# Altium PCB SWMD_21DD_ LV_DR_Brush_V1.1.pcbdoc (part 1 of 2)
Units mm, origin at the board's own origin, x right, y up, seen from the top; angles counter-clockwise.
Board outline 127.72 x 40.81 mm, 4 copper layers (Top Layer, MidLayer1, MidLayer2, Bottom Layer); 125 components, 86 nets, 396 pads, 310 vias.
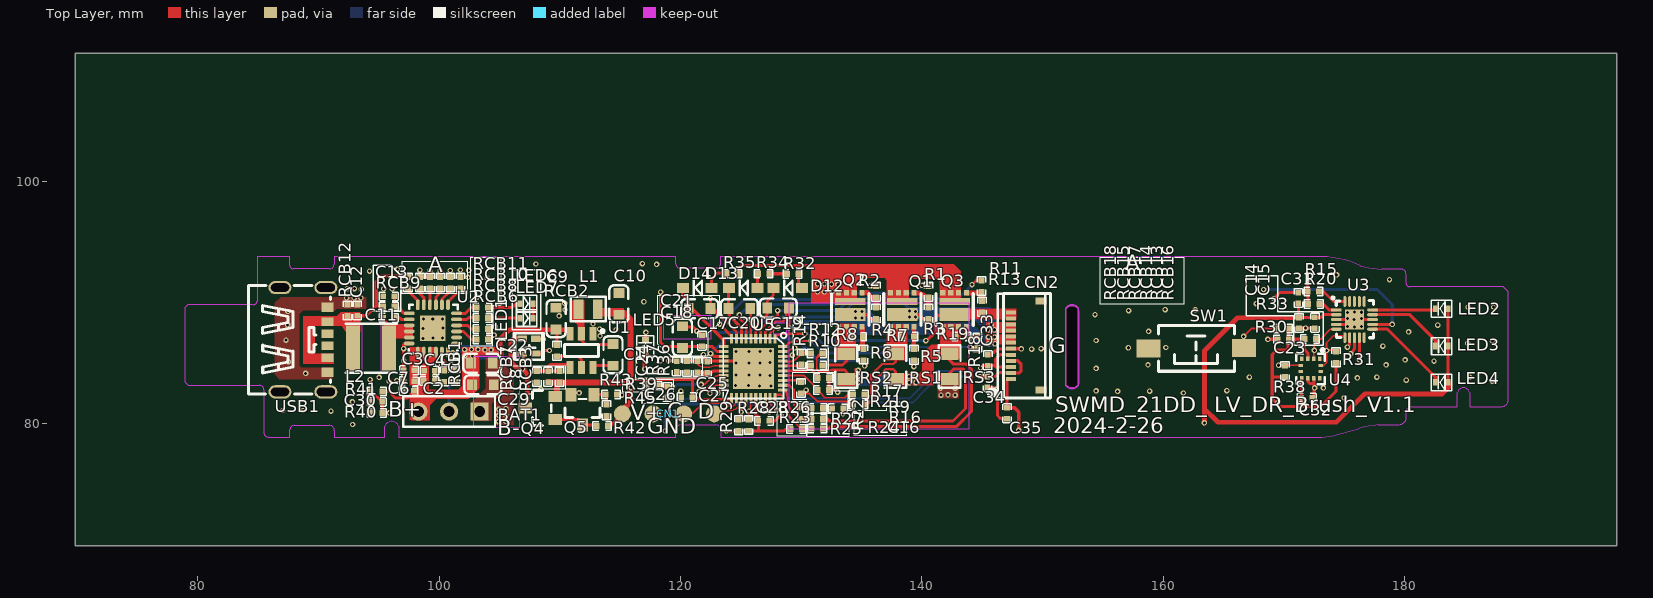
[diagram p0: Top Layer view]
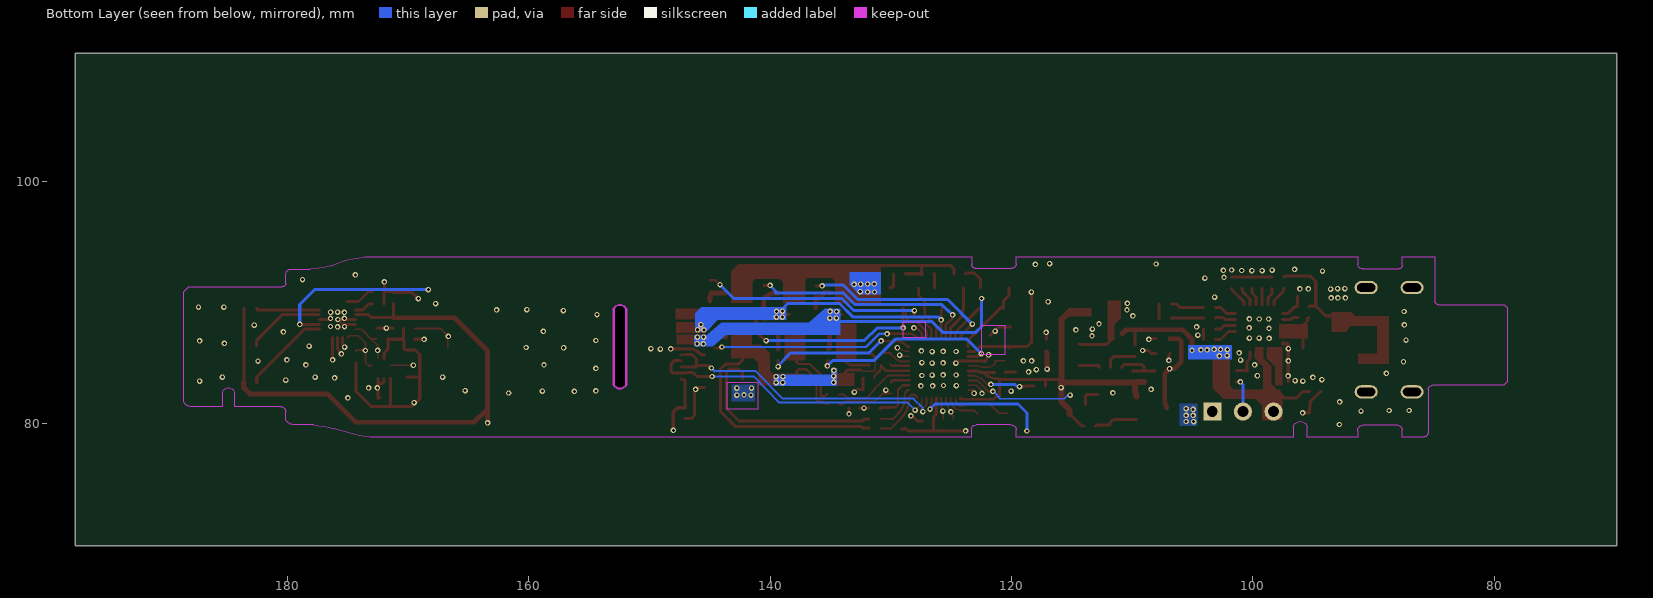
[diagram p1: Bottom Layer view, seen from below]
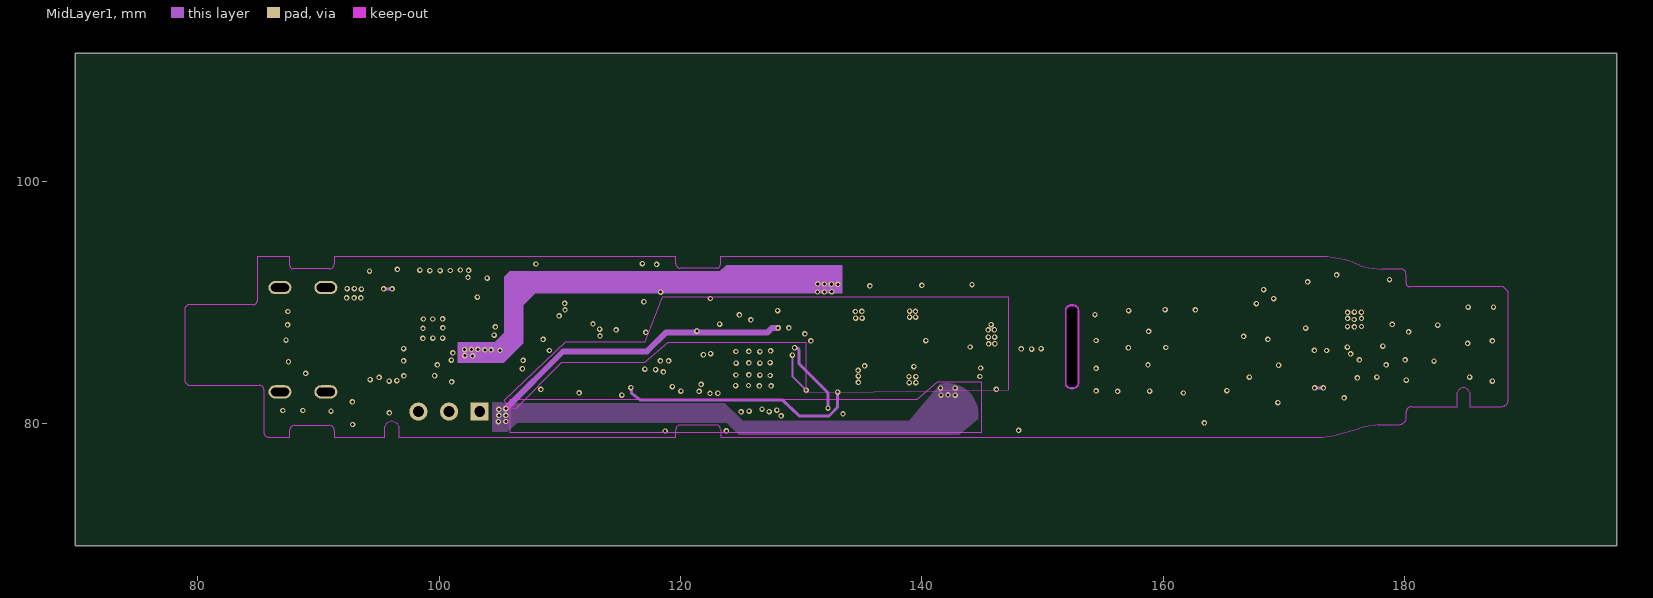
[diagram p2: MidLayer1]
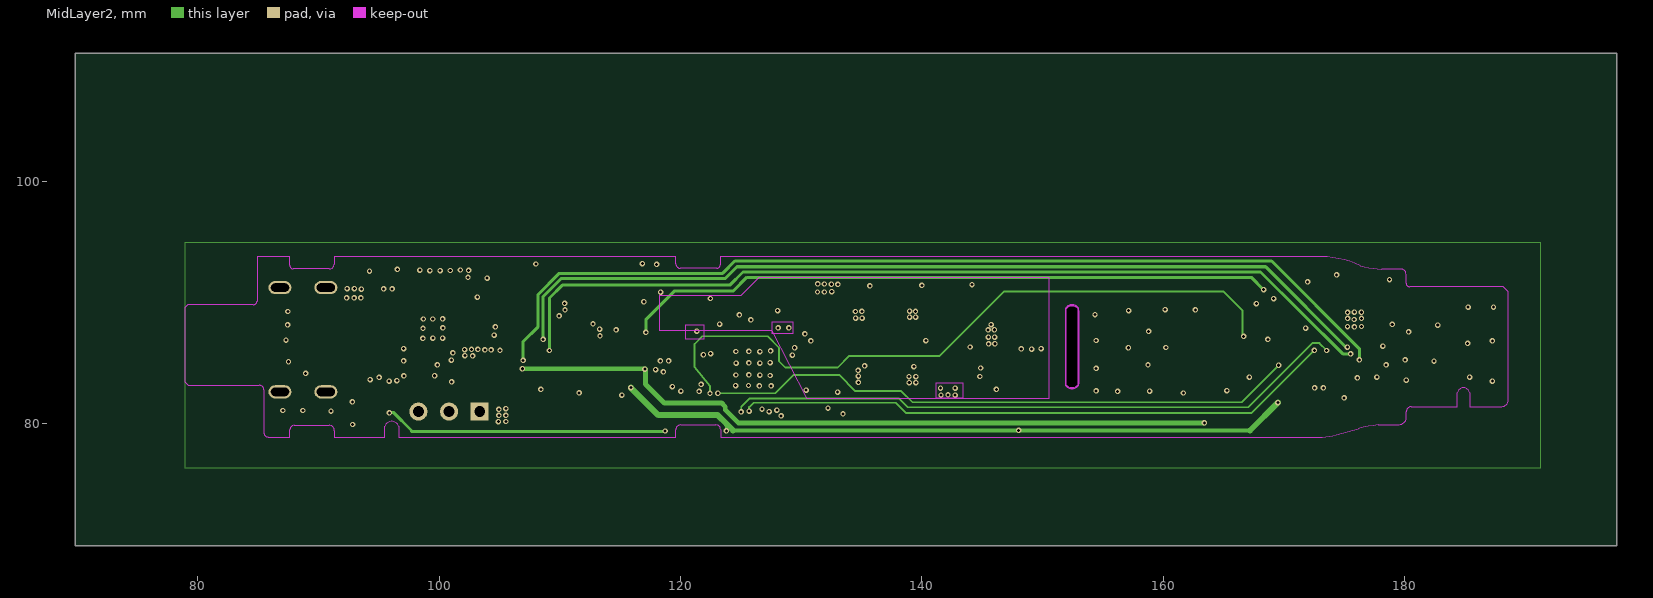
[diagram p3: MidLayer2]

## Layer stack, top to bottom
Top Layer: signal copper (thickness not stored)
Dielectric: dielectric 0.32, FR-4, Dk 4.8
MidLayer1: signal copper (thickness not stored)
Dielectric: dielectric 0.32, FR-4, Dk 4.8
MidLayer2: signal copper (thickness not stored)
Dielectric: dielectric 0.32, FR-4, Dk 4.8
Bottom Layer: signal copper (thickness not stored)

## Board outline
197.57,69.85 69.85,69.85 69.85,110.66 197.57,110.66
cut-out: 151.905,83.375 151.905,89.3 cw(c152.442,89.28) 152.98,89.3 152.98,83.3 cw(c152.446,83.388)

## Components (designator, comment, footprint, x,y, rotation, side; value= is the part's Value field where it differs from the comment)
BAT1 "BAT" HDR1X3 103.359,80.969 r180 top
C1 "C0805" LC-0603_C 114.404,85.672 r270 top
C2 "CC" LC-0402_C 99.181,83.506 r180 top
C3 "CC" LC-0402_C 97.51,84.387 r0 top
C4 "CC" LC-0402_C 99.198,84.366 r180 top
C5 "CC" LC-0402_C 100.429,83.894 r270 top
C6 "CC" LC-0402_C 97.467,82.692 r180 top
C7 "CC" LC-0402_C 97.508,83.478 r0 top
C8 "CC" LC-0402_C 109.03,83.86 r90 top
C9 "C0805" LC-0603_C 109.686,88.674 r90 top
C10 "C0805" LC-0603_C 114.892,89.895 r90 top
C11 "CC" LC-0402_C 95.82,88.75 r180 top
C12 "CC" LC-0402_C 93.214,89.361 r90 top
C13 "CC" LC-0402_C 95.82,90.52 r180 top
C14 "CC" LC-0402_C 171.242,88.316 r270 top
C15 "CC" LC-0402_C 172.563,88.329 r270 top
C16 "C0603" LC-0402_C 133.029,81.254 r180 top
C17 "CAP_S" LC-0402_C 121.778,86.835 r270 top
C18 "C0805" LC-0603_C 120.157,87.142 r270 top
C19 "C0805" LC-0603_C 128.09,89.55 r0 top
C20 "C0805" LC-0603_C 124.88,89.5 r0 top
C21 "C0805" LC-0603_C 121.58,89.5 r0 top
C22 "C0805" LC-0603_C 103.537,84.982 r0 top
C23 "CC" LC-0402_C 169.931,86.964 r180 top
C24 "CAP_S" LC-0402_C 119.68,84.7 r270 top
C25 "CAP_S" LC-0402_C 122.2,84.65 r90 top
C26 "CAP_S" LC-0402_C 118.9,82.59 r270 top
C27 "CAP_S" LC-0402_C 120.525,82.163 r0 top
C28 "CAP_S" LC-0402_C 126.907,80.196 r180 top
C29 "C0805" LC-0603_C 103.627,83.192 r0 top
C30 "CAP_S" LC-0402_C 94.83,81.77 r0 top
C31 "CAPACITOR" LC-0402_C 171.193,90.381 r90 top
C32 "CC" LC-0402_C 171.891,82.122 r0 top
C33 "CAP_S" LC-0402_C 145.46,85.23 r90 top
C34 "CAP_S" LC-0402_C 145.42,83.42 r270 top
C35 "CAP_S" LC-0402_C 147.05,80.83 r270 top
CN1 "4P-2.54-8" XH2.54-SMD4P 118.993,80.78 r0 top
CN2 "CON12" SMD-12 147.38,89.177 r270 top
D12 "DIODE" LC-SOD-323 128.88,91.2 r0 top
D13 "DIODE" LC-SOD-323 125.18,91.2 r0 top
D14 "DIODE" LC-SOD-323 121.38,91.2 r0 top
L1 "L_-_5X4" L1206A 111.552,89.439 r0 top
L2 "L_-_5X4" L1206 92.848,86.241 r0 top
LED1 "LED-1" LED0402-4 108.008,85.783 r90 top
LED2 "LED" LED0402 183.58,89.5 r90 top
LED3 "LED" LED0402 183.581,86.406 r90 top
LED4 "LED" LED0402 183.58,83.4 r90 top
LED5 "LED" LED0402 117.104,85.9 r0 top
LED6 "LED" LED0402 106.72,89.9 r270 top
LED7 "LED" LED0402 106.72,88.7 r270 top
Q1 "CJBM3020" DFN-3X3_8 139.35,90.8 r180 top
Q2 "CJBM3020" DFN-3X3_8 135.04,90.8 r180 top
Q3 "CJBM3020" DFN-3X3_8 143.683,90.8 r180 top
Q4 "PMOS_3" LC-SOT-23(SOT-23-3) 108.38,81.26 r0 top
Q5 "PMOS_3" LC-SOT-23(SOT-23-3) 111.88,81.115 r90 top
R1 "RES_SEMI" LC-0402_R 140.53,90.89 r270 top
R2 "RES_SEMI" LC-0402_R 136.2,90.89 r270 top
R3 "RES_SEMI" LC-0402_R 140.53,89.1 r90 top
R4 "RES_SEMI" LC-0402_R 136.21,89.1 r270 top
R5 "RES_SEMI" LC-0402_R 139.327,85.688 r90 top
R6 "RES_SEMI" LC-0402_R 135.157,85.696 r90 top
R7 "RES_SEMI" LC-0402_R 138.88,87.2 r0 top
R8 "RES_SEMI" LC-0402_R 134.63,87.17 r0 top
R9 "R0402" LC-0402_R 131.83,83.76 r0 top
R10 "RES_SEMI" LC-0402_R 131.29,84.8 r180 top
R11 "RES_SEMI" LC-0402_R 144.942,91.366 r270 top
R12 "RES_SEMI" LC-0402_R 131.29,85.8 r180 top
R13 "RES_SEMI" LC-0402_R 144.997,89.66 r90 top
R14 "R0402" LC-0402_R 130.03,85.35 r90 top
R15 "R" LC-0402_R 172.442,90.928 r180 top
R16 "R0402" LC-0402_R 131.81,82.77 r0 top
R17 "RES_SEMI" LC-0402_R 134.76,82.39 r180 top
R18 "RES_SEMI" LC-0402_R 144.595,86.7 r90 top
R19 "RES_SEMI" LC-0402_R 143.28,87.191 r0 top
R20 "R" LC-0402_R 172.459,89.888 r180 top
R21 "RES_SEMI" LC-0402_R 134.75,81.57 r180 top
R22 "R0402" LC-0402_R 129.97,82.93 r270 top
R23 "R0402" LC-0402_R 129.59,79.53 r180 top
R24 "RES_SEMI" LC-0402_R 131.33,81.25 r0 top
R25 "RES_SEMI" LC-0402_R 131.32,79.56 r180 top
R26 "R0402" LC-0402_R 130.04,80.84 r270 top
R27 "RES_SEMI" LC-0402_R 131.32,80.37 r180 top
R28 "R" LC-0402_R 125.654,79.854 r270 top
R29 "R" LC-0402_R 124.822,79.848 r90 top
R30 "R" LC-0402_R 169.914,87.851 r180 top
R31 "R" LC-0402_R 174.297,85.476 r90 top
R32 "RES_T" LC-0402_R 129.28,92.385 r0 top
R33 "R" LC-0402_R 172.16,86.976 r180 top
R34 "RES_T" LC-0402_R 126.88,92.39 r180 top
R35 "RES_T" LC-0402_R 124.3,92.39 r180 top
R36 "R0402" LC-0402_R 121.39,84.68 r90 top
R37 "R0402" LC-0402_R 120.53,84.69 r90 top
R38 "R" LC-0402_R 170.077,84.328 r270 top
R39 "R0402" LC-0402_R 117.66,83.09 r0 top
R40 "RES1" LC-0402_R 94.83,80.85 r0 top
R41 "RES1" LC-0402_R 94.83,82.63 r0 top
R42 "RES1" LC-0402_R 113.504,79.758 r0 top
R43 "RES1" LC-0402_R 114.253,82.387 r0 top
R45 "RES1" LC-0402_R 113.869,81.075 r270 top
RCB1 "RR" LC-0402_R 101.365,83.907 r270 top
RCB2 "RR" LC-0402_R 109.781,86.01 r270 top
RCB3 "RR" LC-0402_R 109.98,83.85 r270 top
RCB6 "RR" LC-0402_R 103.59,86.94 r0 top
RCB7 "RR" LC-0402_R 108.11,83.86 r90 top
RCB8 "RR" LC-0402_R 103.59,87.82 r0 top
RCB9 "RR" LC-0402_R 95.82,89.66 r180 top
RCB10 "RR" LC-0402_R 103.58,88.72 r180 top
RCB11 "RR" LC-0402_R 103.59,89.6 r180 top
RCB12 "RR" LC-0402_R 92.39,89.35 r90 top
RCB13 "RR" LC-0402_R 100.92,91.66 r90 top
RCB14 "RR" LC-0402_R 100.09,91.66 r90 top
RCB15 "RR" LC-0402_R 98.42,91.66 r90 top
RCB16 "RR" LC-0402_R 101.77,91.66 r90 top
RCB17 "RR" LC-0402_R 99.25,91.66 r90 top
RCB18 "RR" LC-0402_R 97.43,91.66 r90 top
RS1 "RES_2512" LC-0805_R 137.8,84.71 r90 top
RS2 "RES_2512" LC-0805_R 133.73,84.705 r90 top
RS3 "RES_2512" LC-0805_R 142.3,84.71 r90 top
SW1 "SW-PB" SW_SMD-3_6_2.5 162.705,86.213 r180 top
U1 "TP8204HS" LC-SOT-23-6 111.79,86.029 r90 top
U2 "IP2326" QFN-24 101.442,86.609 r90 top
U3 "HTR3212S" QFN-20 174.339,89.395 r270 top
U4 "DA260B" LGA12 172.97,85.349 r180 top
U5 "SWM21DD8U7" QFN40 126.032,84.552 r270 top
USB1 "TYPE-C_6P" TYPE-C-SMD_6P 88.776,86.924 r270 top

## Footprints (in the part's own frame and the unit in brackets; to place one, negate y for a bottom-side part, rotate by r counter-clockwise, add the part's x,y. Pads: shape width x height; smd on the part's side, far side on the other; paste and mask are expansions set on the pad)
DFN-3X3_8 [mil]
  rect 17x18 smd: 1(0,0) 2(25.59,0) 3(51.18,0) 4(76.77,0) 5(76.77,109.58) 6(51.18,109.58) 7(25.59,109.58) 8(0,109.58)
  rect 100x23 smd: 9(38.33,27.5)
  rect 100x42 smd: 10(38.33,70.83)
  silkscreen extent -23,2 99,106
HDR1X3 [mm]
  rect 1.5x1.5 hole 0.9: 1(0,0)
  round 1.5 hole 0.9: 2(2.54,0) 3(5.08,0)
  silkscreen extent -1.27,-1.27 6.35,1.27
L1206 [mil]
  rect 46x147 smd: 1(0,0) 2(117.92,0)
  silkscreen extent -23,-80 143,80
L1206A [mm]
  rect 0.8x1.6 smd: 1(0,0) 2(1.6,0)
  silkscreen extent -0.63,-0.97 2.26,1.04
LC-0402_C [mm]
  rect 0.46x0.46 smd: 1(-0.45,0) 2(0.45,0)
  silkscreen extent -0.78,-0.35 0.77,0.36
LC-0402_R [mm]
  rect 0.5x0.5 smd: 1(-0.48,0) 2(0.48,0)
  silkscreen extent -0.78,-0.35 0.77,0.35
LC-0603_C [mm]
  rect 0.8x0.9 smd: 1(-0.9,0) 2(0.9,0)
  silkscreen extent -1.53,-0.79 1.53,0.79
LC-0805_R [mm]
  rect 1x1.47 smd: 1(-1.05,0) 2(1.05,0)
  silkscreen extent -1.77,-0.9 1.77,0.9
LC-SOD-323 [mm]
  rect 1x0.83 smd: 1(1.18,0) 2(-1.18,0)
  silkscreen extent -0.27,-0.6 0.4,0.6
LC-SOT-23(SOT-23-3) [mm]
  rect 1.1x0.9 smd: 1(1.25,-0.95) 2(1.25,0.95) 3(-1.25,0)
  silkscreen extent -0.65,-1.46 0.9,1.46
LC-SOT-23-6 [mm]
  rect 1.1x0.6 smd: 1(1.4,-0.95) 2(1.4,0) 3(1.4,0.95) 4(-1.4,0.95) 5(-1.4,0) 6(-1.4,-0.95)
  silkscreen extent -0.5,-1.87 1.72,1.4
LED0402 [mil]
  rect 22x16 smd: 1(0,0) 2(0,41.25)
  silkscreen extent -28,-12 27,54
LED0402-4 [mil]
  rect 21x32 smd: 1(0,0) 2(48.33,0) 3(48.33,44.17) 4(0,44.17)
  silkscreen extent -20,-26 65,67
LGA12 [mil]
  rect 11x15 smd: 1(0,0) 2(19.68,0) 3(39.37,0) 4(59.05,0) 7(59.05,63.85) 8(39.37,63.85) 9(19.68,63.85) 10(0,63.85)
  rect 15x11 smd: 5(61.67,22.08) 6(61.67,41.77) 11(-2.61,41.77) 12(-2.61,22.08)
  silkscreen extent -16,-32 77,83
QFN40 [mm]
  rect 0.8x0.25 smd: 1(-2.45,1.8) 2(-2.45,1.4) 3(-2.45,1) 4(-2.45,0.6) 5(-2.45,0.2) 6(-2.45,-0.2) 7(-2.45,-0.6) 8(-2.45,-1) 9(-2.45,-1.4) 10(-2.45,-1.8) 21(2.45,-1.8) 22(2.45,-1.4) 23(2.45,-1) 24(2.45,-0.6) 25(2.45,-0.2) 26(2.45,0.2) 27(2.45,0.6) 28(2.45,1) 29(2.45,1.4) 30(2.45,1.8)
  rect 0.25x0.8 smd: 11(-1.8,-2.45) 12(-1.4,-2.45) 13(-1,-2.45) 14(-0.6,-2.45) 15(-0.2,-2.45) 16(0.2,-2.45) 17(0.6,-2.45) 18(1,-2.45) 19(1.4,-2.45) 20(1.8,-2.45) 31(1.8,2.45) 32(1.4,2.45) 33(1,2.45) 34(0.6,2.45) 35(0.2,2.45) 36(-0.2,2.45) 37(-0.6,2.45) 38(-1,2.45) 39(-1.4,2.45) 40(-1.8,2.45)
  rect 3.4x3.4 smd: 41(0,0)
  silkscreen extent -2.96,-2.5 2.5,2.74
QFN-20 [mil]
  rect 10x35 smd: 1(0,0)
  oval 10x35 smd: 2(15.75,0) 3(31.5,0) 4(47.24,0) 5(62.99,0) 11(62.99,117.99) 12(47.24,117.99) 13/2(31.5,117.99) 14(15.75,117.99) 15(0,117.99)
  oval 35x10 smd: 6(90.49,27.5) 7(90.49,43.25) 8(90.49,59) 9(90.49,74.74) 10(90.49,90.49) 16(-27.5,90.49) 17(-27.5,74.74) 18(-27.5,59) 19(-27.5,43.25) 20(-27.5,27.5)
  rect 65x63 smd: 13(31.5,59)
  silkscreen extent -40,-12 91,122
QFN-24 [mil]
  rect 83x83 smd: 0(49.21,77.13)
  oval 12x35 smd: 1(0,0) 2(19.69,0) 3(39.37,0) 4(59.06,0) 5(78.74,0) 6(98.43,0) 13(98.43,154.26) 14(78.74,154.26) 15(59.06,154.26) 16(39.37,154.26) 17(19.69,154.26) 18(0,154.26)
  oval 35x12 smd: 7(126.34,27.92) 8(126.34,47.6) 9(126.34,67.29) 10(126.34,86.97) 11(126.34,106.66) 19(-27.92,126.34) 20(-27.92,106.66) 21(-27.92,86.97) 22(-27.92,67.29) 23(-27.92,47.6) 24(-27.92,27.92)
  oval 35x12.01 smd: 12(126.34,126.34)
  silkscreen extent -32,-4 127,155
SMD-12 [mil]
  rect 22x36 smd: 0(252.38,97.5) 0/2(-37.62,97.5)
  rect 13x32 smd: 1(216.53,0) 2(196.85,0) 3(177.16,0) 4(157.48,0) 5(137.79,0) 6(118.11,0) 7(98.42,0) 8(78.74,0) 9(59.05,0) 10(39.37,0) 11(19.68,0) 12(0,0)
  silkscreen extent -62,-25 279,130
SW_SMD-3_6_2.5 [mm]
  rect 2x1.5 smd: 1(-3.996,-0.02) 2(3.937,0)
  silkscreen extent -3.21,-1.9 3.09,1.9
TYPE-C-SMD_6P [mm]
  oval 1.1x1.9 hole 0.7 slot 1.5 at 90 deg: 7(-4.32,-1.963) 7/2(4.32,-1.963) 7/3(-4.32,1.838) 7/4(4.32,1.838)
  rect 0.7x1 smd: A5(-0.5,1.963) A9(1.5,1.963) B5(0.5,1.963) B9(-1.5,1.963)
  rect 0.8x1 smd: A12(2.7,1.963) B12(-2.7,1.963)
  silkscreen extent -4.5,-4.56 4.5,2.24
XH2.54-SMD4P [mm]
  round 1.4 smd: 1(-3.81,0) 2(-1.27,0) 3(1.27,0) 4(3.81,0)

## Via types
v1: diameter 0.45, hole 0.25, Top Layer to Bottom Layer, 310 vias

## Nets (pads, with @x,y where several pads share a name; then routed paths per layer and width w, separated by ;. In a path a pad name is that pad's centre, name@x,y a point inside that pad or via, vN(x,y) a via of type N, cw(c..) or ccw(c..) an arc to the next point about the centre after c; other vN are vias at no path point)
3V3: C8.1 C10.1 C23.1 C25.1 C27.2 C28.2 C32.1 C35.1 CN1.1 CN2.1 L1.2 Q4.2 R9.2 R16.2 R23.2 R28.2 R29.1 R30.1 R31.1 R33.2 R36.1 R38.2 R39.1 R42.2 RCB3.2 U4.3 U4.7 U5.16 U5.21 U5.26 | length 477.9
  Top Layer w0.2: C27.2@120.975,82.163 120.98,82.19 121.31,82.19 121.5,82 U5.21@124.232,82
  Top Layer w0.25: R42.2@113.984,79.758 114.203,79.758 114.203,79.8 CN1.1@115.183,80.78 ; R39.1@117.18,83.09 117.18,83.59 117.22,83.63 ; C27.2@120.975,82.163 120.975,83.655 120.99,83.67 ; R36.1@121.43,84.16 R36.1@121.39,84.2 C25.1@122.01,84.2 ; U5.21@124.232,82 U5.21@124.232,82.102 ; 124.412,79.368 125.19,79.368 ; R29.1@124.822,79.368 125.19,79.368 ; U5.26@126.232,82.102 126.232,80.738 126.48,80.49 ; C28.2@126.457,80.196 126.48,80.303 126.48,80.49 ; R23.2@129.11,79.53 129.06,79.53 129.048,79.541 128.901,79.541 128.824,79.619 128.58,79.374 126.48,79.374 ; R9.2@132.31,83.76 R16.2@132.29,82.77 132.74,82.85 v1(133.01,82.58) ; C35.1@147.05,81.28 147.05,83.566 CN2.1@147.38,83.677 ; R38.2@170.077,83.848 170.082,83.843 170.082,83.85 169.027,83.85 ; R30.1@170.394,87.851 170.381,87.838 C23.1@170.381,86.964 ; U4.7@171.47,83.727 171.441,83.697 C32.1@171.441,82.122 171.463,82.101 171.463,81.403 ; R33.2@171.68,86.976 R33.2@171.67,86.966 ; U4.3@171.97,85.349 171.97,85.83 171.67,86.131 R33.2@171.67,86.966 ; R31.1@174.297,84.996 174.297,82.64 173.06,81.403 171.463,81.403 ; 115.87,83.63 117.22,83.63 ; 115.87,83.63 117.22,83.63 ; 115.87,83.63 117.22,83.63 ; 115.87,83.63 117.22,83.63 ; 115.87,83.63 117.22,83.63 ; 115.87,83.63 117.22,83.63 ; 115.87,83.63 117.22,83.63 ; 115.87,83.63 117.22,83.63 ; 115.87,83.63 117.22,83.63 ; 115.87,83.63 117.22,83.63 ; 115.87,83.63 117.22,83.63 ; 115.87,83.63 117.22,83.63 ; 117.22,83.63 120.923,83.63 ; 117.22,83.63 120.923,83.63 ; 117.22,83.63 120.923,83.63 ; 117.22,83.63 120.923,83.63 ; 117.22,83.63 120.923,83.63 ; 117.22,83.63 120.923,83.63 ; 117.22,83.63 120.923,83.63 ; 117.22,83.63 120.923,83.63 ; 117.22,83.63 120.923,83.63 ; 117.22,83.63 120.923,83.63 ; 117.22,83.63 120.923,83.63 ; 117.22,83.63 120.923,83.63 ; 117.22,83.63 120.923,83.63 ; 120.923,83.63 120.99,83.67 ; 120.923,83.63 120.99,83.67 ; 120.923,83.63 120.99,83.67 ; 120.923,83.63 120.99,83.67 ; 120.923,83.63 120.99,83.67 ; 120.923,83.63 120.99,83.67 ; 120.923,83.63 120.99,83.67 ; 120.923,83.63 120.99,83.67 ; 120.923,83.63 120.99,83.67 ; 120.923,83.63 120.99,83.67 ; 120.923,83.63 120.99,83.67 ; 120.923,83.63 120.99,83.67 ; 120.923,83.63 120.99,83.67 ; 120.99,83.67 121.442,83.696 ; 120.99,83.67 121.442,83.696 ; 120.99,83.67 121.442,83.696 ; 120.99,83.67 121.442,83.696 ; 120.99,83.67 121.442,83.696 ; 120.99,83.67 121.442,83.696 ; 120.99,83.67 121.442,83.696 ; 120.99,83.67 121.442,83.696 ; 120.99,83.67 121.442,83.696 ; 120.99,83.67 121.442,83.696 ; 120.99,83.67 121.442,83.696 ; 120.99,83.67 121.442,83.696 ; 120.99,83.67 121.442,83.696 ; 120.99,83.67 121.442,83.696 ; 121.442,83.696 122.07,83.96 ; 121.442,83.696 122.07,83.96 ; 121.442,83.696 122.07,83.96 ; 121.442,83.696 122.07,83.96 ; 121.442,83.696 122.07,83.96 ; 121.442,83.696 122.07,83.96 ; 121.442,83.696 122.07,83.96 ; 121.442,83.696 122.07,83.96 ; 121.442,83.696 122.07,83.96 ; 121.442,83.696 122.07,83.96 ; 121.442,83.696 122.07,83.96 ; 121.442,83.696 122.07,83.96 ; 121.442,83.696 122.07,83.96 ; 121.442,83.696 122.07,83.96 ; C25.1@122.01,84.2 C25.1@122.2,84.2 ; C25.1@122.01,84.2 122.25,84.2 C25.1@122.01,84.2 ; 122.07,83.96 C25.1@122.2,84.09 ; 122.07,83.96 C25.1@122.2,84.09 ; 122.07,83.96 C25.1@122.2,84.09 ; 122.07,83.96 C25.1@122.2,84.09 ; 122.07,83.96 C25.1@122.2,84.09 ; 122.07,83.96 C25.1@122.2,84.09 ; 122.07,83.96 C25.1@122.2,84.09 ; 122.07,83.96 C25.1@122.2,84.09 ; 122.07,83.96 C25.1@122.2,84.09 ; 122.07,83.96 C25.1@122.2,84.09 ; 122.07,83.96 C25.1@122.2,84.09 ; 122.07,83.96 C25.1@122.2,84.09 ; 122.07,83.96 C25.1@122.2,84.09 ; 122.07,83.96 C25.1@122.2,84.09 ; C25.1@122.2,84.09 C25.1@122.2,84.2 ; C25.1@122.2,84.09 C25.1@122.2,84.2 ; C25.1@122.2,84.09 C25.1@122.2,84.2 ; C25.1@122.2,84.09 C25.1@122.2,84.2 ; C25.1@122.2,84.09 C25.1@122.2,84.2 ; C25.1@122.2,84.09 C25.1@122.2,84.2 ; C25.1@122.2,84.09 C25.1@122.2,84.2 ; C25.1@122.2,84.09 C25.1@122.2,84.2 ; C25.1@122.2,84.09 C25.1@122.2,84.2 ; C25.1@122.2,84.09 C25.1@122.2,84.2 ; C25.1@122.2,84.09 C25.1@122.2,84.2 ; C25.1@122.2,84.09 C25.1@122.2,84.2 ; C25.1@122.2,84.09 C25.1@122.2,84.2 ; C25.1@122.2,84.09 C25.1@122.2,84.2 ; 122.599,84.201 122.251,84.201 122.599,84.201 ; 122.599,84.201 122.75,84.352 ; 122.599,84.201 122.75,84.352 ; 122.75,84.352 U5.16@123.582,84.352 122.75,84.352 ; v1(123.8,79.37) 125.188,79.37 ; v1(123.8,79.37) 125.188,79.37 ; v1(123.8,79.37) 125.188,79.37 ; 125.19,79.368 125.648,79.368 R28.2@125.654,79.374 ; R28.2@125.654,79.374 126.48,79.374 ; R28.2@125.654,79.374 126.48,79.374 ; R28.2@125.654,79.374 126.48,79.374 ; R28.2@125.654,79.374 125.654,79.42 R28.2@125.654,79.374 ; 126.48,79.374 126.48,80.49 ; 126.48,79.374 126.48,80.49 ; 169.027,82.04 169.027,83.85 ; 169.027,82.04 v1@169.49,81.577 ; 169.027,82.04 169.027,83.85 ; 169.027,82.04 v1@169.49,81.577 ; 169.027,83.85 169.027,85.7 169.39,86.063 170.18,86.063 170.347,86.23 170.347,86.846 170.381,86.88 C23.1@170.381,86.964 ; v1@169.49,81.577 v1(169.49,81.71) ; v1@169.49,81.577 169.664,81.403 ; v1@169.49,81.577 v1(169.49,81.71) ; v1@169.49,81.577 169.664,81.403 ; v1@169.49,81.577 v1(169.49,81.71) ; v1@169.49,81.577 v1(169.49,81.71) ; 169.664,81.403 171.463,81.403 ; 169.664,81.403 171.463,81.403 ; C23.1@170.381,86.964 R33.2@171.668,86.964 ; C23.1@170.381,86.964 R33.2@171.668,86.964 ; R33.2@171.668,86.964 R33.2@171.67,86.966 ; R33.2@171.668,86.964 R33.2@171.67,86.966
  Top Layer w0.3: C35.1@147.05,81.28 147.67,81.28 148.02,80.93 v1(148.02,79.41)
  Top Layer w0.5: C8.1@109.03,83.41 109.772,83.41 109.772,82.674 Q4.2@109.63,82.21 ; RCB3.2@109.98,83.37 115.86,83.37 115.87,83.36 ; C10.1@115.09,89.116 115.343,89.116 115.87,88.59 115.87,86.04 115.87,83.63 ; CN1.1@115.183,80.78 CN1.1@115.183,81.063 ; CN1.1@115.183,80.78 CN1.1@115.183,81.063 ; CN1.1@115.183,80.78 CN1.1@115.183,81.063 ; CN1.1@115.183,81.063 115.183,81.103 115.87,81.79 115.87,83.36 ; 115.87,83.36 115.87,83.63 ; 115.87,83.36 115.876,83.354 ; 115.87,83.36 115.87,83.63 ; 115.87,83.36 115.876,83.354 ; 115.87,83.36 115.87,83.63 ; 115.87,83.36 115.876,83.354 ; 115.87,83.36 115.87,83.63 ; 115.87,83.36 115.87,83.63 ; 115.87,83.36 115.876,83.354 ; 115.87,83.36 115.876,83.354 ; 115.87,83.36 115.87,83.63 ; 115.87,83.36 115.876,83.354 ; 115.87,83.36 115.87,83.63 ; 115.87,83.36 115.87,83.63 ; 115.87,83.36 115.876,83.354 ; 115.87,83.36 115.87,83.63 ; 115.87,83.36 115.876,83.354 ; 115.87,83.36 115.87,83.63 ; 115.87,83.36 115.876,83.354 ; 115.87,83.36 115.87,83.63 ; v1@115.876,82.96 v1(115.89,82.96) ; v1@115.876,82.96 115.876,83.354 ; v1@115.876,82.96 v1(115.89,82.96) ; v1@115.876,82.96 115.876,83.354 ; v1@115.876,82.96 v1(115.89,82.96) ; v1@115.876,82.96 115.876,83.354 ; v1@115.876,82.96 115.876,83.354 ; v1@115.876,82.96 v1(115.89,82.96) ; v1@115.876,82.96 v1(115.89,82.96) ; v1@115.876,82.96 115.876,83.354 ; v1@115.876,82.96 v1(115.89,82.96) ; v1@115.876,82.96 115.876,83.354 ; v1@115.876,82.96 v1(115.89,82.96) ; v1@115.876,82.96 115.876,83.354 ; v1@115.876,82.96 v1(115.89,82.96) ; v1@115.876,82.96 115.876,83.354 ; v1@115.876,82.96 v1(115.89,82.96) ; v1@115.876,82.96 115.876,83.354
  MidLayer1 w0.25: v1(115.89,82.96) 115.93,82.49 116.65,81.95 128.43,81.95 129.83,80.61 132.31,80.61 133.01,81.32 v1(133.01,82.58)
  MidLayer2 w0.25: v1(123.8,79.37) 123.8,79.93 ; v1(123.8,79.37) 123.8,79.93 ; v1(123.8,79.37) 123.8,79.93 ; 123.8,79.93 123.815,79.945 ; 123.8,79.93 123.815,79.945 ; 123.8,79.93 123.815,79.945
  MidLayer2 w0.3: v1(148.02,79.41) v1@148.02,79.4 ; 124.36,79.4 v1@148.02,79.4 ; 124.36,79.4 v1@148.02,79.4 ; 124.36,79.4 v1@148.02,79.4 ; 124.36,79.4 v1@148.02,79.4 ; 124.36,79.4 v1@148.02,79.4 ; v1@148.02,79.4 167.18,79.4 ; v1@148.02,79.4 167.18,79.4 ; v1@148.02,79.4 167.18,79.4 ; v1@148.02,79.4 167.18,79.4
  MidLayer2 w0.5: v1(115.89,82.96) 118.17,80.68 ; v1(115.89,82.96) 118.17,80.68 ; v1(115.89,82.96) 118.17,80.68 ; v1(115.89,82.96) 118.17,80.68 ; v1(115.89,82.96) 118.17,80.68 ; v1(115.89,82.96) 118.17,80.68 ; v1(115.89,82.96) 118.17,80.68 ; v1(115.89,82.96) 118.17,80.68 ; 118.17,80.68 123.08,80.68 ; 118.17,80.68 123.08,80.68 ; 118.17,80.68 123.08,80.68 ; 118.17,80.68 123.08,80.68 ; 118.17,80.68 123.08,80.68 ; 118.17,80.68 123.08,80.68 ; 118.17,80.68 123.08,80.68 ; 118.17,80.68 123.08,80.68 ; 123.08,80.68 123.815,79.945 ; 123.08,80.68 123.815,79.945 ; 123.08,80.68 123.815,79.945 ; 123.08,80.68 123.815,79.945 ; 123.08,80.68 123.815,79.945 ; 123.08,80.68 123.815,79.945 ; 123.08,80.68 123.815,79.945 ; 123.08,80.68 123.815,79.945 ; 123.815,79.945 124.36,79.4 ; 123.815,79.945 124.36,79.4 ; 123.815,79.945 124.36,79.4 ; 123.815,79.945 124.36,79.4 ; 123.815,79.945 124.36,79.4 ; 167.18,79.4 v1(169.49,81.71) ; 167.18,79.4 v1(169.49,81.71) ; 167.18,79.4 v1(169.49,81.71) ; 167.18,79.4 v1(169.49,81.71)
  other v1: 123.8,79.37 115.89,82.96 115.89,82.96
3V3L: C14.1 C15.1 C31.1 LED1.3 LED2.1 LED3.1 LED4.1 LED5.1 Q4.3 U3.2 | length 143.6
  Top Layer w0.25: C31.1@171.193,89.931 C14.1@171.193,88.74 ; U3.2@174.339,88.995 173.27,88.995 173.035,88.76 173.016,88.779 C15.1@172.52,88.779 ; LED4.1@183.58,83.4 LED2.1@183.58,89.5 ; C14.1@171.193,88.74 C14.1@171.22,88.766 ; C14.1@171.193,88.74 C14.1@171.22,88.766 ; C14.1@171.22,88.766 C14.1@171.242,88.766 ; C14.1@171.22,88.766 C14.1@171.242,88.766 ; C14.1@171.242,88.766 171.255,88.779 C15.1@172.52,88.779 ; C15.1@172.52,88.779 C15.1@172.563,88.779 C15.1@172.52,88.779
  Top Layer w0.4: LED1.3@106.886,87.011 106.16,87.011 105.94,86.791 105.94,85.1 106.52,84.52 v1@106.88,84.52 ; v1(163.4,80.03) 163.4,81.21 ; C14.1@171.193,88.74 166.15,88.74 163.4,85.99 163.4,81.21 ; v1@106.88,84.52 107.307,84.093 ; v1@106.88,84.52 v1(106.89,84.52) ; v1@106.88,84.52 107.307,84.093 ; v1(106.89,84.52) v1@106.974,84.52 ; v1(106.89,84.52) v1@106.974,84.52 ; v1@106.974,84.52 107.037,84.457 v1@106.974,84.52 ; 107.307,81.774 Q4.3@107.13,81.26 107.307,81.774 ; 107.307,81.774 107.307,84.093 ; 107.307,81.774 107.307,84.093 ; LED5.1@117.05,85.846 LED5.1@117.104,85.9 LED5.1@117.05,85.846 ; LED5.1@117.05,85.846 v1(117.05,84.49) LED5.1@117.05,85.846 ; 163.4,81.21 164.53,80.08 ; 163.4,81.21 164.53,80.08 ; 164.53,80.08 174.34,80.08 ; 164.53,80.08 174.34,80.08 ; 174.34,80.08 176.7,82.44 ; 174.34,80.08 176.7,82.44 ; 176.7,82.44 183.1,82.44 ; 176.7,82.44 183.1,82.44 ; 183.1,82.44 183.63,82.97 ; 183.1,82.44 183.63,82.97 ; 183.63,82.97 LED4.1@183.63,83.35 ; 183.63,82.97 LED4.1@183.63,83.35 ; LED4.1@183.63,83.35 LED4.1@183.58,83.4 LED4.1@183.63,83.35
  MidLayer2 w0.25: v1@117.02,84.49 v1(117.05,84.49) v1@117.1,84.49
  MidLayer2 w0.4: v1(106.89,84.52) v1@117.02,84.49 ; v1@117.1,84.49 117.1,83.24 118.66,81.68 123.4,81.68 123.71,81.37 123.71,81.11 124.79,80.03 v1(163.4,80.03)
  other v1: 117.05,84.49 106.89,84.52
12V: BAT1.3 C2.2 C4.2 C6.1 C9.1 C17.2 C18.2 C22.1 C29.1 Q1.2 Q1.3 Q1.4 Q1.9 Q2.2 Q2.3 Q2.4 Q2.9 Q3.2 Q3.3 Q3.4 Q3.9 R32.1 R34.1 R35.1 R41.2 RCB2.1 U1.3 U2.21 U2.22 U5.12 | length 304.4
  Top Layer w0.25: U2.21@99.233,85.9 99.233,85.31 98.74,84.817 C4.2@98.74,84.524 ; U2.22@99.733,85.9 99.733,85.55 99.69,85.507 99.69,85.474 C4.2@98.74,84.524 ; RCB2.1@109.781,86.49 109.781,87.609 C9.1@109.686,87.774 U1.3@110.646,87.624 ; C18.2@120.157,86.242 120.303,86.31 120.376,86.382 120.9,86.382 ; C17.2@121.778,86.385 121.778,86.382 122.27,86.382 ; R35.1@124.78,92.39 124.78,92.83 125.02,93.07 127.47,93.07 ; R34.1@127.36,92.39 R34.1@127.56,92.39 ; R32.1@128.8,92.385 128.795,92.39 R34.1@127.56,92.39 ; 95.84,82.63 R41.2@95.31,82.63 95.84,82.63 ; 95.84,82.63 96.37,82.1 ; 95.84,82.63 96.37,82.1 ; 96.37,82.1 97.4,82.1 ; 96.37,82.1 97.4,82.1 ; 97.4,82.1 C6.1@97.824,82.524 ; 97.4,82.1 C6.1@97.824,82.524 ; C6.1@97.824,82.524 98.006,82.524 C6.1@97.824,82.524 ; C4.2@98.74,84.374 C4.2@98.74,84.524 ; C4.2@98.74,84.374 C4.2@98.748,84.366 C4.2@98.74,84.374 ; C4.2@98.74,84.374 C4.2@98.74,84.524 ; 118.322,86.74 v1@118.322,90.832 ; 118.322,86.74 118.68,86.382 ; 118.322,86.74 v1@118.322,90.832 ; 118.322,86.74 118.68,86.382 ; 118.322,86.74 v1@118.322,90.832 ; 118.322,86.74 118.68,86.382 ; 118.322,86.74 v1@118.322,90.832 ; 118.322,86.74 118.68,86.382 ; 118.322,86.74 v1@118.322,90.832 ; 118.322,86.74 118.68,86.382 ; 118.322,86.74 118.68,86.382 ; 118.322,86.74 v1@118.322,90.832 ; 118.322,86.74 v1@118.322,90.832 ; 118.322,86.74 118.68,86.382 ; 118.322,86.74 v1@118.322,90.832 ; 118.322,86.74 118.68,86.382 ; 118.322,86.74 v1@118.322,90.832 ; 118.322,86.74 118.68,86.382 ; 118.322,86.74 v1@118.322,90.832 ; 118.322,86.74 118.68,86.382 ; 118.322,86.74 v1@118.322,90.832 ; 118.322,86.74 118.68,86.382 ; 118.322,86.74 v1@118.322,90.832 ; 118.322,86.74 118.68,86.382 ; 118.322,86.74 v1@118.322,90.832 ; 118.322,86.74 118.68,86.382 ; 118.322,86.74 118.68,86.382 ; 118.322,86.74 v1@118.322,90.832 ; 118.322,86.74 v1@118.322,90.832 ; 118.322,86.74 118.68,86.382 ; 118.322,86.74 v1@118.322,90.832 ; 118.322,86.74 118.68,86.382 ; 118.322,86.74 v1@118.322,90.832 ; 118.322,86.74 118.68,86.382 ; 118.322,86.74 118.68,86.382 ; 118.322,86.74 v1@118.322,90.832 ; 118.322,86.74 v1@118.322,90.832 ; 118.322,86.74 118.68,86.382 ; 118.322,86.74 v1@118.322,90.832 ; 118.322,86.74 118.68,86.382 ; 118.322,86.74 v1@118.322,90.832 ; 118.322,86.74 118.68,86.382 ; 118.322,86.74 v1@118.322,90.832 ; 118.322,86.74 118.68,86.382 ; 118.322,86.74 v1@118.322,90.832 ; 118.322,86.74 118.68,86.382 ; v1@118.322,90.832 v1@118.35,90.86 ; v1@118.322,90.832 v1@118.35,90.86 ; v1@118.322,90.832 v1@118.35,90.86 ; v1@118.322,90.832 v1@118.35,90.86 ; v1@118.322,90.832 v1@118.35,90.86 ; v1@118.322,90.832 v1@118.35,90.86 ; v1@118.322,90.832 v1@118.35,90.86 ; v1@118.322,90.832 v1@118.35,90.86 ; v1@118.322,90.832 v1@118.35,90.86 ; v1@118.322,90.832 v1@118.35,90.86 ; v1@118.322,90.832 v1@118.35,90.86 ; v1@118.322,90.832 v1@118.35,90.86 ; v1@118.322,90.832 v1@118.35,90.86 ; v1@118.322,90.832 v1@118.35,90.86 ; v1@118.322,90.832 v1@118.35,90.86 ; v1@118.322,90.832 v1@118.35,90.86 ; v1@118.322,90.832 v1@118.35,90.86 ; v1@118.322,90.832 v1@118.35,90.86 ; v1@118.322,90.832 v1@118.35,90.86 ; v1@118.322,90.832 v1@118.35,90.86 ; v1@118.322,90.832 v1@118.35,90.86 ; v1@118.322,90.832 v1@118.35,90.86 ; v1@118.322,90.832 v1@118.35,90.86 ; v1@118.35,90.86 v1(118.36,90.86) ; v1@118.35,90.86 v1(118.36,90.86) ; v1@118.35,90.86 v1(118.36,90.86) ; v1@118.35,90.86 v1(118.36,90.86) ; v1@118.35,90.86 v1(118.36,90.86) ; v1@118.35,90.86 v1(118.36,90.86) ; v1@118.35,90.86 v1(118.36,90.86) ; v1@118.35,90.86 v1(118.36,90.86) ; v1@118.35,90.86 v1(118.36,90.86) ; v1@118.35,90.86 v1(118.36,90.86) ; v1@118.35,90.86 v1(118.36,90.86) ; v1@118.35,90.86 v1(118.36,90.86) ; v1@118.35,90.86 v1(118.36,90.86) ; v1@118.35,90.86 v1(118.36,90.86) ; v1@118.35,90.86 v1(118.36,90.86) ; v1@118.35,90.86 v1(118.36,90.86) ; v1@118.35,90.86 v1(118.36,90.86) ; v1@118.35,90.86 v1(118.36,90.86) ; v1@118.35,90.86 v1(118.36,90.86) ; v1@118.35,90.86 v1(118.36,90.86) ; v1@118.35,90.86 v1(118.36,90.86) ; v1@118.35,90.86 v1(118.36,90.86) ; v1@118.35,90.86 v1(118.36,90.86) ; 118.68,86.382 120.9,86.382 ; 118.68,86.382 120.9,86.382 ; 118.68,86.382 120.9,86.382 ; 118.68,86.382 120.9,86.382 ; 118.68,86.382 120.9,86.382 ; 118.68,86.382 120.9,86.382 ; 118.68,86.382 120.9,86.382 ; 118.68,86.382 120.9,86.382 ; 118.68,86.382 120.9,86.382 ; 118.68,86.382 120.9,86.382 ; 118.68,86.382 120.9,86.382 ; 118.68,86.382 120.9,86.382 ; 118.68,86.382 120.9,86.382 ; 118.68,86.382 120.9,86.382 ; 118.68,86.382 120.9,86.382 ; 118.68,86.382 120.9,86.382 ; 118.68,86.382 120.9,86.382 ; 118.68,86.382 120.9,86.382 ; 118.68,86.382 120.9,86.382 ; 118.68,86.382 120.9,86.382 ; 118.68,86.382 120.9,86.382 ; 118.68,86.382 120.9,86.382 ; 118.68,86.382 120.9,86.382 ; 120.9,86.382 122.27,86.382 ; 120.9,86.382 122.27,86.382 ; 120.9,86.382 122.27,86.382 ; 120.9,86.382 122.27,86.382 ; 120.9,86.382 122.27,86.382 ; 120.9,86.382 122.27,86.382 ; 120.9,86.382 122.27,86.382 ; 120.9,86.382 122.27,86.382 ; 120.9,86.382 122.27,86.382 ; 120.9,86.382 122.27,86.382 ; 120.9,86.382 122.27,86.382 ; 120.9,86.382 122.27,86.382 ; 120.9,86.382 122.27,86.382 ; 120.9,86.382 122.27,86.382 ; 120.9,86.382 122.27,86.382 ; 120.9,86.382 122.27,86.382 ; 120.9,86.382 122.27,86.382 ; 120.9,86.382 122.27,86.382 ; 120.9,86.382 122.27,86.382 ; 120.9,86.382 122.27,86.382 ; 120.9,86.382 122.27,86.382 ; 120.9,86.382 122.27,86.382 ; 120.9,86.382 122.27,86.382 ; 120.9,86.382 122.27,86.382 ; 122.27,86.382 122.59,86.382 ; 122.27,86.382 122.59,86.382 ; 122.27,86.382 122.59,86.382 ; 122.27,86.382 122.59,86.382 ; 122.27,86.382 122.59,86.382 ; 122.27,86.382 122.59,86.382 ; 122.27,86.382 122.59,86.382 ; 122.27,86.382 122.59,86.382 ; 122.27,86.382 122.59,86.382 ; 122.27,86.382 122.59,86.382 ; 122.27,86.382 122.59,86.382 ; 122.27,86.382 122.59,86.382 ; 122.27,86.382 122.59,86.382 ; 122.27,86.382 122.59,86.382 ; 122.27,86.382 122.59,86.382 ; 122.27,86.382 122.59,86.382 ; 122.27,86.382 122.59,86.382 ; 122.27,86.382 122.59,86.382 ; 122.27,86.382 122.59,86.382 ; 122.27,86.382 122.59,86.382 ; 122.27,86.382 122.59,86.382 ; 122.27,86.382 122.59,86.382 ; 122.27,86.382 122.59,86.382 ; 122.27,86.382 122.59,86.382 ; 122.27,86.382 122.59,86.382 ; 122.59,86.382 123.02,85.952 ; 122.59,86.382 123.02,85.952 ; 122.59,86.382 123.02,85.952 ; 122.59,86.382 123.02,85.952 ; 122.59,86.382 123.02,85.952 ; 122.59,86.382 123.02,85.952 ; 122.59,86.382 123.02,85.952 ; 122.59,86.382 123.02,85.952 ; 122.59,86.382 123.02,85.952 ; 122.59,86.382 123.02,85.952 ; 122.59,86.382 123.02,85.952 ; 122.59,86.382 123.02,85.952 ; 122.59,86.382 123.02,85.952 ; 122.59,86.382 123.02,85.952 ; 122.59,86.382 123.02,85.952 ; 122.59,86.382 123.02,85.952 ; 122.59,86.382 123.02,85.952 ; 122.59,86.382 123.02,85.952 ; 122.59,86.382 123.02,85.952 ; 122.59,86.382 123.02,85.952 ; 122.59,86.382 123.02,85.952 ; 122.59,86.382 123.02,85.952 ; 122.59,86.382 123.02,85.952 ; 122.59,86.382 123.02,85.952 ; 122.59,86.382 123.02,85.952 ; 123.02,85.952 U5.12@123.582,85.952 ; 123.02,85.952 U5.12@123.582,85.952 ; 123.02,85.952 U5.12@123.582,85.952 ; 123.02,85.952 U5.12@123.582,85.952 ; 123.02,85.952 U5.12@123.582,85.952 ; 123.02,85.952 U5.12@123.582,85.952 ; 123.02,85.952 U5.12@123.582,85.952 ; 123.02,85.952 U5.12@123.582,85.952 ; 123.02,85.952 U5.12@123.582,85.952 ; 123.02,85.952 U5.12@123.582,85.952 ; 123.02,85.952 U5.12@123.582,85.952 ; 123.02,85.952 U5.12@123.582,85.952 ; 123.02,85.952 U5.12@123.582,85.952 ; 123.02,85.952 U5.12@123.582,85.952 ; 123.02,85.952 U5.12@123.582,85.952 ; 123.02,85.952 U5.12@123.582,85.952 ; 123.02,85.952 U5.12@123.582,85.952 ; 123.02,85.952 U5.12@123.582,85.952 ; 123.02,85.952 U5.12@123.582,85.952 ; 123.02,85.952 U5.12@123.582,85.952 ; 123.02,85.952 U5.12@123.582,85.952 ; 123.02,85.952 U5.12@123.582,85.952 ; 123.02,85.952 U5.12@123.582,85.952 ; 123.02,85.952 U5.12@123.582,85.952 ; 123.02,85.952 U5.12@123.582,85.952 ; R34.1@127.47,92.3 R34.1@127.56,92.39 ; R34.1@127.47,92.3 127.47,93.07 ; R34.1@127.47,92.3 127.47,93.07 ; R34.1@127.47,92.3 R34.1@127.56,92.39 ; 127.47,93.07 130.93,93.07 ; 127.47,93.07 130.93,93.07 ; 127.47,93.07 130.93,93.07 ; 130.93,93.07 131.47,92.53 ; 130.93,93.07 131.47,92.53 ; 130.93,93.07 131.47,92.53 ; v1(131.37,91.56) 131.37,92.42 ; v1(131.37,91.56) 131.37,92.42 ; v1(131.37,91.56) 131.37,92.42 ; 131.37,92.42 131.47,92.53 ; 131.37,92.42 131.47,92.53 ; 131.37,92.42 131.47,92.53 ; v1(132.53,90.9) Q2.4@133.09,90.9 ; v1(132.53,90.9) Q2.4@133.09,90.9 ; v1(132.53,90.9) Q2.4@133.09,90.9 ; v1(132.53,90.9) Q2.4@133.09,90.9 ; v1(132.53,90.9) Q2.4@133.09,90.9 ; v1(132.53,90.9) Q2.4@133.09,90.9 ; v1(132.53,90.9) Q2.4@133.09,90.9 ; v1(132.53,90.9) Q2.4@133.09,90.9 ; v1(132.53,90.9) Q2.4@133.09,90.9 ; v1(132.53,90.9) Q2.4@133.09,90.9 ; v1(132.53,90.9) Q2.4@133.09,90.9 ; v1(132.53,90.9) Q2.4@133.09,90.9 ; v1(132.53,90.9) Q2.4@133.09,90.9 ; Q2.4@133.09,90.8 Q2.4@133.09,90.9 ; Q2.4@133.09,90.8 Q2.4@133.09,90.9 ; Q2.4@133.09,90.8 Q2.4@133.09,90.9 ; Q2.4@133.09,90.8 Q2.4@133.09,90.9 ; Q2.4@133.09,90.8 Q2.4@133.09,90.9 ; Q2.4@133.09,90.8 Q2.4@133.09,90.9 ; Q2.4@133.09,90.8 Q2.4@133.09,90.9 ; Q2.4@133.09,90.8 Q2.4@133.09,90.9 ; Q2.4@133.09,90.8 Q2.4@133.09,90.9 ; Q2.4@133.09,90.8 Q2.4@133.09,90.9 ; Q2.4@133.09,90.8 Q2.4@133.09,90.9 ; Q2.4@133.09,90.8 Q2.4@133.09,90.9 ; Q2.4@133.09,90.8 Q2.4@133.09,90.9
  Top Layer w0.4: U1.3@110.646,87.624 U1.3@110.595,87.675 ; v1(105.04,86.04) 105.04,86.97 ; v1(105.04,86.04) 105.04,86.97 ; v1(105.04,86.04) 105.04,86.97 ; v1(105.04,86.04) 105.04,86.97 ; 105.04,86.97 105.82,87.75 ; 105.04,86.97 105.82,87.75 ; 105.04,86.97 105.82,87.75 ; 105.04,86.97 105.82,87.75 ; 105.82,87.75 110.519,87.75 ; 105.82,87.75 110.519,87.75 ; 105.82,87.75 110.519,87.75 ; 105.82,87.75 110.519,87.75 ; 110.519,87.75 U1.3@110.595,87.675 ; 110.519,87.75 U1.3@110.595,87.675 ; 110.519,87.75 U1.3@110.595,87.675 ; 110.519,87.75 U1.3@110.595,87.675 ; U1.3@110.595,87.675 U1.3@110.84,87.429 ; U1.3@110.595,87.675 U1.3@110.84,87.429 ; U1.3@110.595,87.675 U1.3@110.84,87.429
  Top Layer w0.6: BAT1.3@98.279,80.969 98.279,81.161 98.748,81.63 C4.2@98.748,84.366
  MidLayer1 w0.25: v1@118.35,90.86 v1(118.36,90.86) v1@118.35,90.86
  other v1: 102.77,85.58 102.77,85.58 102.77,85.58 102.13,85.61 102.13,85.61 102.13,85.61 105.04,86.04 105.04,86.04 105.04,86.04 105.04,86.04 105.04,86.04 105.04,86.04 103.78,86.08 103.78,86.08 103.78,86.08 104.31,86.09 104.31,86.09 104.31,86.09 102.11,86.1 102.11,86.1 102.11,86.1 102.68,86.12 102.68,86.12 102.68,86.12 103.21,86.12 103.21,86.12 103.21,86.12 118.36,90.86 118.36,90.86 118.36,90.86 131.35,90.88 131.35,90.88 131.92,90.88 131.92,90.88 132.53,90.9 132.53,90.9 132.53,90.9 132.53,90.9 132.5,91.52 133.04,91.51 133.04,91.51 131.92,91.54 131.92,91.54 131.37,91.56 131.37,91.56 131.37,91.56
$$$1: BAT1.2 RCB1.2 | length 2.9
  Top Layer w0.25: v1(101.04,83.43) 101.363,83.43 RCB1.2@101.365,83.427
  Bottom Layer w0.25: BAT1.2@100.819,80.969 100.819,83.209 v1(101.04,83.43)
$$$2: C11.1 U2.14 | length 1.3
  Top Layer w0.25: C11.1@96.27,88.75 96.723,88.747 96.86,88.609 U2.14@97.524,88.609
$$$3: RCB16.1 U2.7 | length 1.8
  Top Layer w0.25: U2.7@100.733,89.818 100.733,90.06 101.723,91.05 101.723,91.133 RCB16.1@101.77,91.18
$$$4: RCB13.1 U2.8 | length 1.6
  Top Layer w0.25: U2.8@100.233,89.818 100.233,90.3 100.873,90.94 100.873,91.133 RCB13.1@100.92,91.18
$$$5: RCB14.1 U2.9 | length 1.5
  Top Layer w0.25: U2.9@99.733,89.818 99.733,90.47 100.063,90.8 100.063,91.153 RCB14.1@100.09,91.18
$$$6: RCB17.1 U2.10 | length 1.4
  Top Layer w0.25: U2.10@99.233,89.818 99.233,91.163 RCB17.1@99.25,91.18
$$$7: RCB15.1 U2.11 | length 1.5
  Top Layer w0.25: RCB15.1@98.42,91.18 98.43,91.17 98.43,90.713 98.733,90.41 U2.11@98.733,89.818
$$$8: RCB11.2 U2.6 | length 1.9
  Top Layer w0.25: U2.6@101.442,89.109 102.18,89.109 102.671,89.6 RCB11.2@103.11,89.6
$$$9: RCB6.1 U2.3 | length 1.9
  Top Layer w0.25: U2.3@101.442,87.609 102.02,87.609 102.68,86.949 103.101,86.949 RCB6.1@103.11,86.94
$$$10: RCB8.1 U2.4 | length 1.8
  Top Layer w0.25: U2.4@101.442,88.109 102.37,88.109 102.68,87.799 102.701,87.82 RCB8.1@103.11,87.82
$$$11: R20.1 U3.1 | length 1.6
  Top Layer w0.25: R20.1@172.939,89.888 173.246,89.888 173.74,89.395 U3.1@174.339,89.395
$$$12: R15.1 U3.20 | length 2.5
  Top Layer w0.25: R15.1@172.922,90.928 172.93,90.92 173.273,90.92 174.1,90.093 U3.20@175.038,90.093
$$$13: LED4.2 U3.11 | length 7.3
  Top Layer w0.25: U3.11@177.336,87.795 178.58,87.795 182.532,83.842 LED4.2@182.532,83.4
$$$14: LED2.2 U3.15 | length 5.3
  Top Layer w0.25: U3.15@177.336,89.395 182.47,89.395 182.47,89.438 LED2.2@182.532,89.5
$$$15: LED6.1 RCB11.1 | length 2.8
  Top Layer w0.25: RCB11.1@104.07,89.6 106.061,89.6 106.327,89.866 106.389,89.866 LED6.1@106.72,89.9
$$$16: C11.2 L2.2 U2.15 U2.16 U2.17 | length 6.2
  Top Layer w0.25: C11.2@95.37,88.75 95.463,88.664 95.463,88.52 95.843,88.14 L2.2@95.843,86.241 ; L2.2@95.843,86.241 95.843,88.01 L2.2@95.843,86.241
$$$17: C3.2 C7.2 U2.19 U2.20 | length 8.1
  Top Layer w0.25: U2.20@98.733,85.9 98.733,85.402 98.454,85.123 98.454,85.116 97.958,84.62 ; 97.958,84.62 C7.2@97.958,83.478 97.958,84.62 ; 97.958,84.62 97.958,84.92 ; 97.958,84.62 97.958,84.92 ; 97.958,84.62 97.958,84.92 ; 97.958,84.92 98.22,85.182 ; 97.958,84.92 98.22,85.182 ; 97.958,84.92 98.22,85.182 ; 98.22,85.182 U2.19@98.22,85.887 ; 98.22,85.182 U2.19@98.22,85.887 ; 98.22,85.182 U2.19@98.22,85.887 ; U2.19@98.22,85.887 U2.19@98.233,85.9 ; U2.19@98.22,85.887 U2.19@98.233,85.9 ; U2.19@98.22,85.887 U2.19@98.233,85.9
$$$18: C5.1 RCB1.1 U2.23 | length 2.7
  Top Layer w0.25: U2.23@100.233,85.9 100.233,85.377 100.493,85.117 100.493,84.349 C5.1@100.429,84.344 100.532,84.377 RCB1.1@101.365,84.387
$$$19: C13.1 RCB9.1 U2.13 | length 2.3
  Top Layer w0.25: C13.1@96.27,90.52 96.3,90.49 RCB9.1@96.3,89.66 96.519,89.66 97.07,89.109 U2.13@97.524,89.109
$$$20: RCB18.1 U2.12 | length 1.7
  Top Layer w0.25: RCB18.1@97.43,91.18 97.46,91.15 97.46,90.943 98.233,90.17 U2.12@98.233,89.818
$$$21: D13.1 R34.2 | length 1.2
  Top Layer w0.25: D13.1@126.36,91.2 126.36,92.32 R34.2@126.4,92.39
$$$22: C24.2 R37.1 | length 0.9
  Top Layer w0.25: C24.2@119.68,84.25 120.49,84.25 R37.1@120.53,84.21
$$$23: D14.1 R35.2 | length 2.2
  Top Layer w0.25: D14.1@122.56,91.2 122.56,91.93 123.07,92.44 123.765,92.44 R35.2@123.82,92.39
$$$25: LED7.1 RCB10.1 | length 2.7
  Top Layer w0.25: RCB10.1@104.06,88.72 106.7,88.72 LED7.1@106.72,88.7
$$$26: RCB10.2 U2.5 | length 1.7
  Top Layer w0.25: U2.5@101.442,88.609 102.3,88.609 102.461,88.77 103.05,88.77 RCB10.2@103.1,88.72
$$$27: C1.1 L1.1 U1.2 | length 3.3
  Top Layer w0.25: U1.2@111.79,87.429 111.79,87.37 111.802,87.358 111.802,86.86 112.149,86.513 113.99,86.513 114.019,86.542 114.196,86.542 C1.1@114.404,86.572
$$$28: C1.2 U1.6 | length 1.8
  Top Layer w0.25: U1.6@112.74,84.629 112.74,84.772 C1.2@114.404,84.772
$$$29: RCB2.2 U1.5 | length 2.8
  Top Layer w0.25: RCB2.2@109.781,85.53 111.53,85.53 111.79,85.27 U1.5@111.79,84.629
$$$30: Q4.1 Q5.3 R42.1 | length 3.8
  Top Layer w0.25: Q4.1@109.63,80.31 110.379,80.317 111.56,80.317 111.853,80.023 111.853,79.877 111.948,79.877 Q5.3@111.88,79.865 112.916,79.865 R42.1@113.024,79.758
$$$31: Q5.1 R43.1 R45.1 | length 1.8
  Top Layer w0.25: Q5.1@112.83,82.365 112.852,82.387 R43.1@113.773,82.387 113.869,82.291 R45.1@113.869,81.555
$$$32: Q1.8 R5.2 R7.2 | length 1.9
  Top Layer w0.4: R5.2@139.327,86.168 139.327,87.994 Q1.8@139.35,88.017
$$$33: Q1.1 R1.2 R3.2 | length 2.1
  Top Layer w0.4: Q1.1@139.35,90.8 139.704,90.801 140.104,90.636 140.323,90.417 140.37,90.417 R1.2@140.53,90.41 140.534,89.586 R3.2@140.53,89.58
$$$34: Q2.1 R2.2 R4.1 | length 2.4
  Top Layer w0.4: Q2.1@135.04,90.8 135.312,90.825 135.485,90.825 135.94,90.37 R2.2@136.209,90.37 ; R4.1@136.21,89.58 R2.2@136.209,90.37 ; R2.2@136.209,90.37 R2.2@136.209,90.449 ; R2.2@136.209,90.37 R2.2@136.209,90.449 ; R2.2@136.209,90.449 R2.2@136.2,90.41 R2.2@136.209,90.449
$$$35: Q2.8 R6.2 R8.2 | length 3.6
  Top Layer w0.4: R6.2@135.07,86.212 R6.2@135.157,86.176 R6.2@135.07,86.212 ; R6.2@135.07,86.212 135.07,87.902 R6.2@135.07,86.212
$$$36: Q3.1 R11.2 R13.2 | length 2.3
  Top Layer w0.4: Q3.1@143.683,90.8 144.91,90.8 144.91,90.405 145.037,90.405 ; 145.037,90.405 R13.2@144.997,90.14 145.037,90.405
$$$37: Q3.8 R18.2 R19.2 | length 2
  Top Layer w0.3: R19.2@143.76,87.191 143.683,87.15 R18.2@144.595,87.18
  Top Layer w0.4: Q3.8@143.683,88.017 143.683,87.15 R19.2@143.76,87.191
$$$38: LED1.2 U3.7 | length 75.6
  Top Layer w0.25: LED1.2@108.008,87.011 108.559,87.011 v1(108.62,86.95) ; v1(175.25,86.31) 175.44,86.48 175.44,87.078 U3.7@175.438,87.096
  MidLayer2 w0.25: v1(108.62,86.95) 108.62,90.51 110.11,92 123.71,92 124.68,92.97 168.48,92.97 175.25,86.2 v1(175.25,86.31)